# Altium PCB 4_channel_relay.PcbDoc
Units mm, origin at the board's own origin, x right, y up, seen from the top; angles counter-clockwise.
Board outline 102.27 x 70.58 mm, 2 copper layers (Top Layer, Bottom Layer); 40 components, 52 nets, 202 pads, 43 vias.
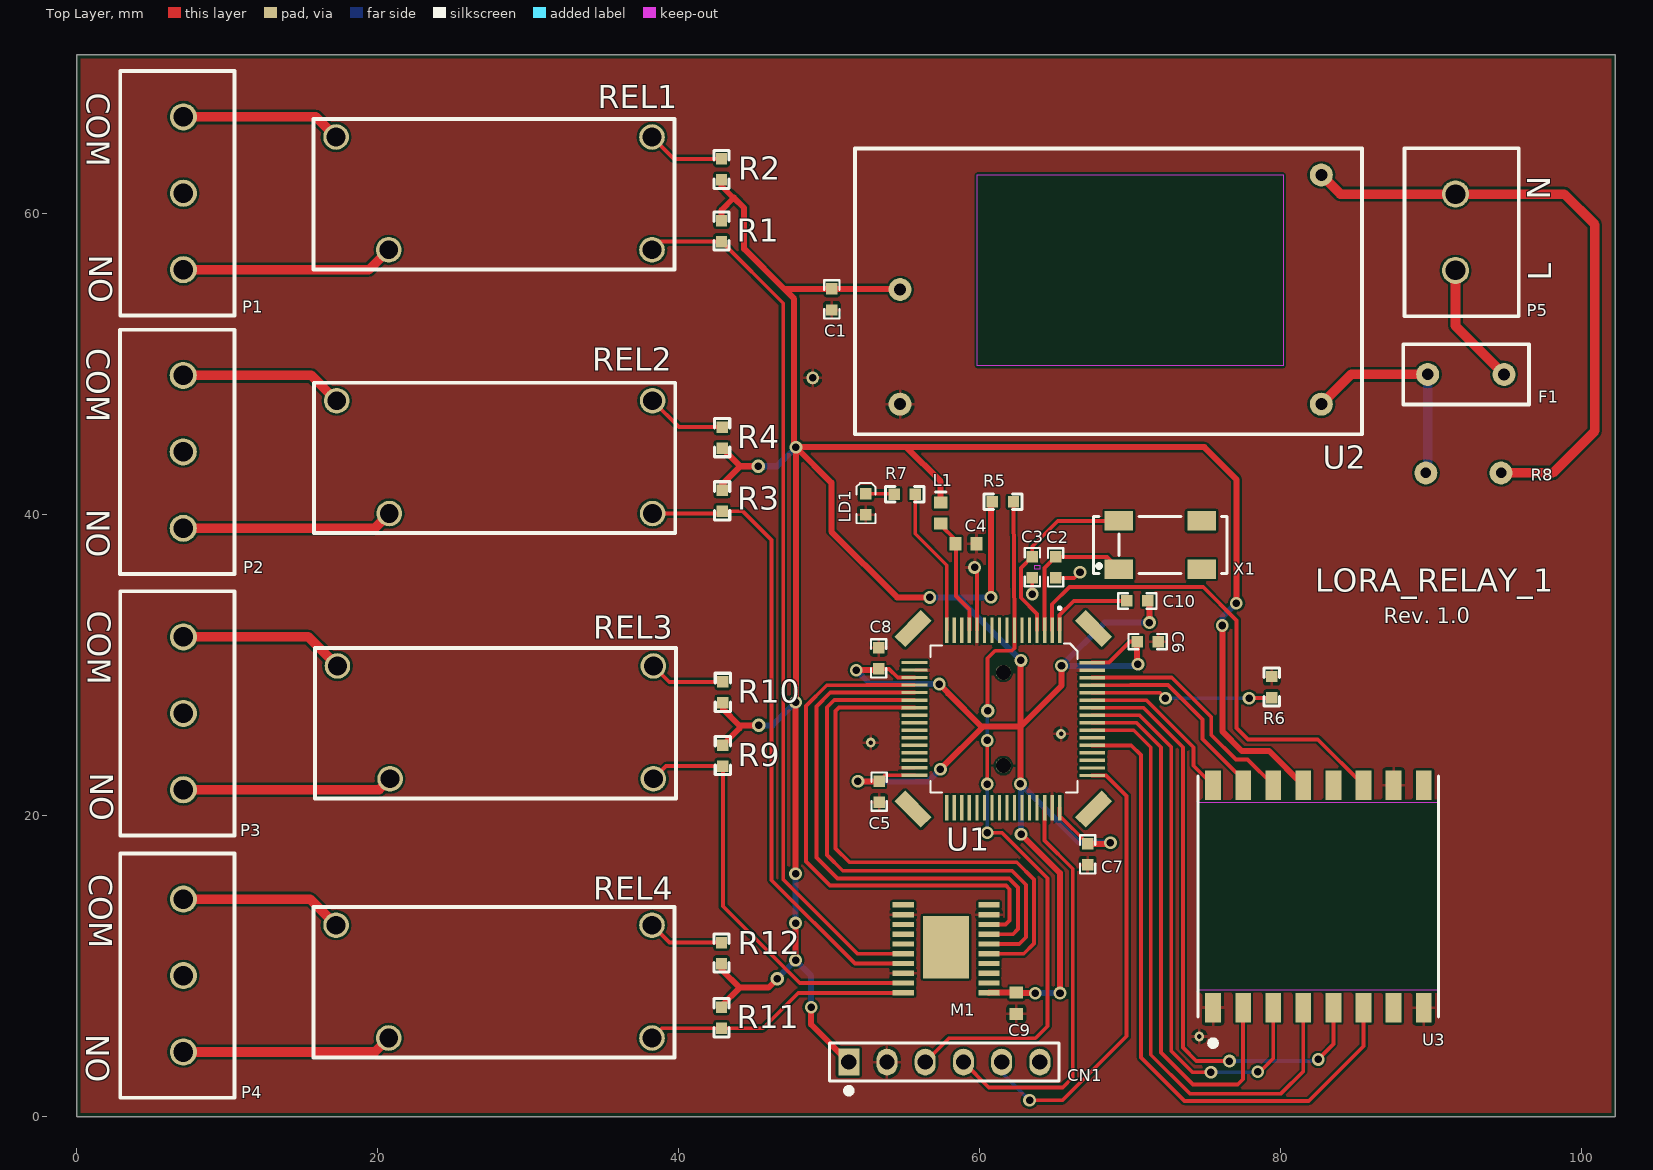
[diagram p0: Top Layer view]
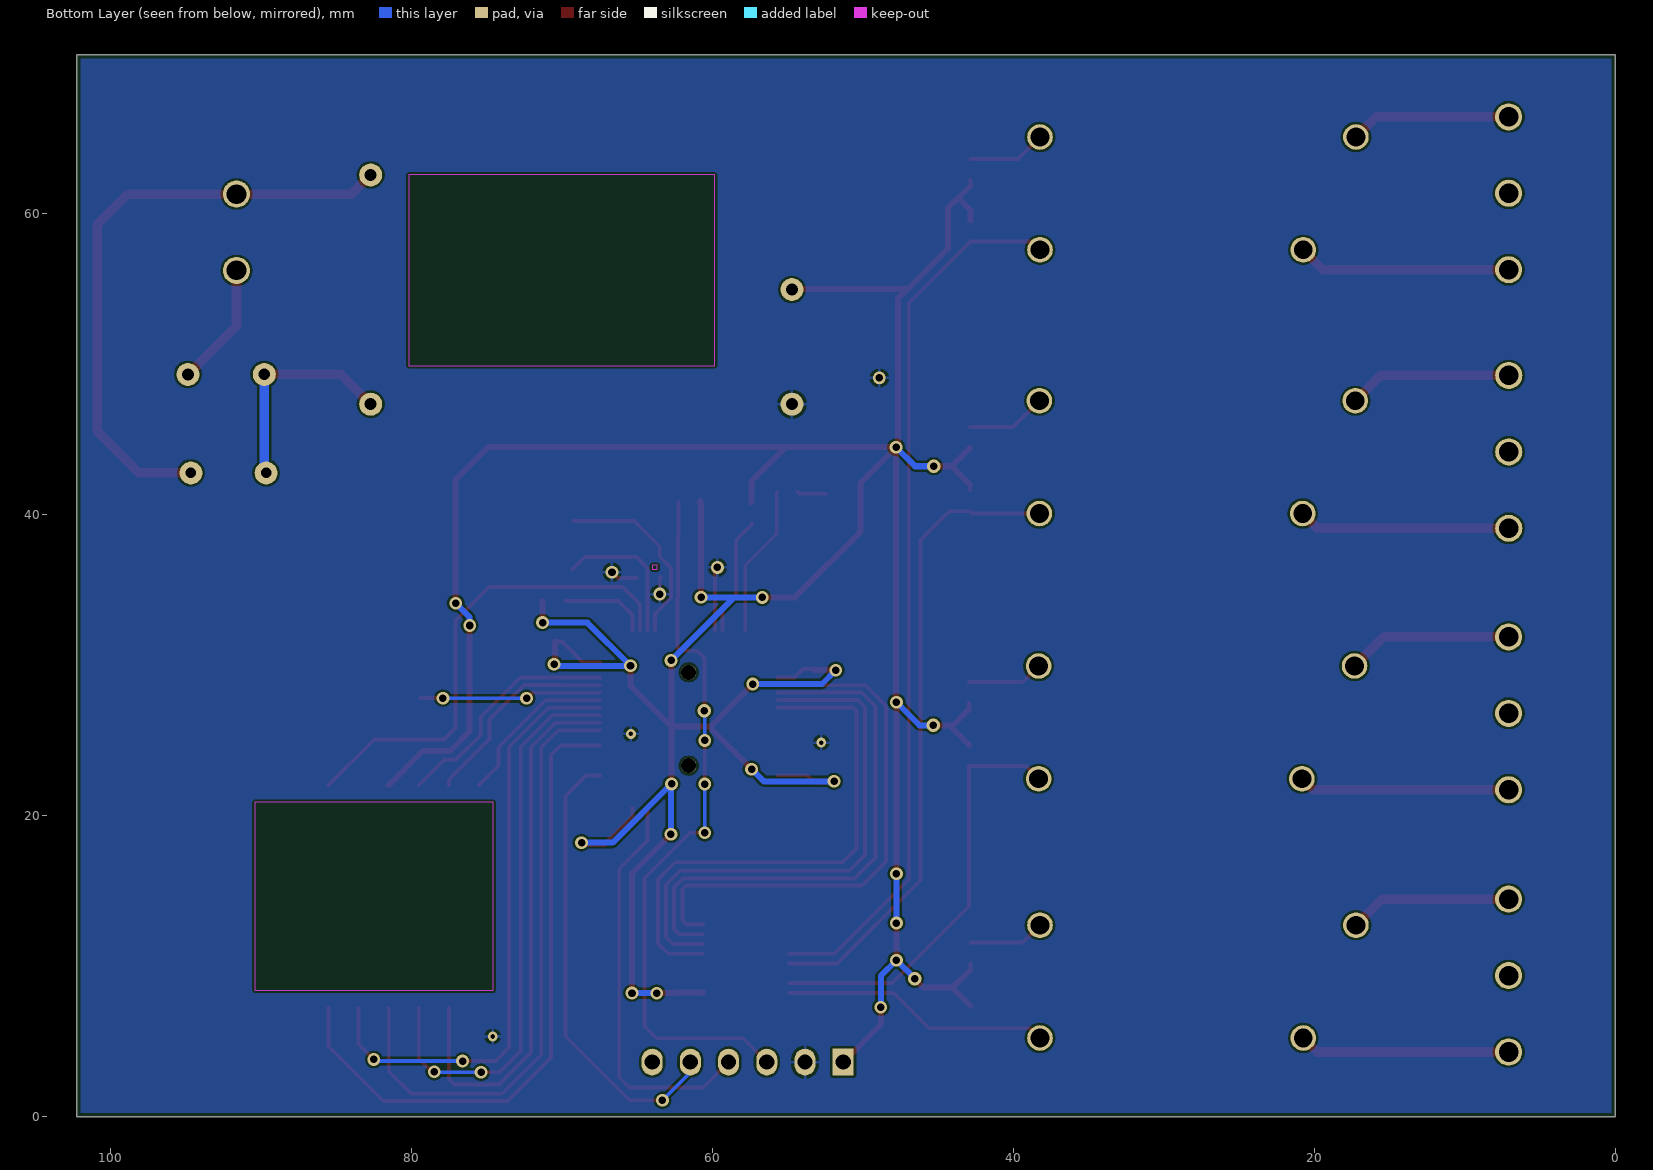
[diagram p1: Bottom Layer view, seen from below]

## Layer stack, top to bottom
Top Solder: solder mask 0.0102, Solder Resist, Dk 3.5
Top Layer: signal copper 0.0356
Dielectric 1: dielectric 0.32, FR-4, Dk 4.8
Bottom Layer: signal copper 0.0356
Bottom Solder: solder mask 0.0102, Solder Resist, Dk 3.5

## Board outline
0,-0.01 102.27,-0.01 102.27,70.57 0,70.57

## Design rules (kind name [scope] priority, off if disabled: settings)
BoardOutlineClearance [All] p1: gap=0.25 ignorepadtopadclearanceinfootprint=FALSE except(0: Arc-SplitContinuation Track-SplitContinuation SMDPad-SplitContinuation THPad-SplitContinuation Via-SplitContinuation Fill-SplitContinuation Poly-SplitContinuation Region-SplitContinuation Text-SplitContinuation)
Clearance [InNetClass('240VAC')] p1: gap=0.15 ignorepadtopadclearanceinfootprint=FALSE except(0: Arc-Hole Track-Hole SMDPad-Hole THPad-Hole Via-Hole Fill-Hole Poly-Hole Region-Hole Text-Hole; 3: Arc-Arc Arc-Track Track-Track)
Clearance Clearance-xPP-xTP-xTT [All] p2: gap=0.15 ignorepadtopadclearanceinfootprint=FALSE except(0: Arc-Hole Track-Hole SMDPad-Hole THPad-Hole Via-Hole Fill-Hole Poly-Hole Region-Hole Text-Hole)
ComponentClearance [All] p1: gap=0.25 collisioncheckmode=3 verticalgap=0.25 showdistances=FALSE
DiffPairsRouting [All] p1: maxlimit=0.25 minlimit=0.25 mostfreqgap=0.25 toplayer_minwidth=0.381 toplayer_maxwidth=0.381 toplayer_prefwidth=0.381 bottomlayer_minwidth=0.381 bottomlayer_maxwidth=0.381 bottomlayer_prefwidth=0.381 maxuncoupledlength=12.5
Height [All] p1: minheight=0 maxheight=25 prefheight=12.5
HoleSize HoleSize-PTH [All] p1: absolutevalues=TRUE maxlimit=2 minlimit=0.3 maxpercent=80.000 minpercent=20.000
HoleToHoleClearance [All] p1: gap=0.35 allowstackedmicrovias=TRUE
MinimumAnnularRing "Minimum IAR  >0.45mm" [((ObjectKind = 'Pad') OR (ObjectKind = 'Via')) And (Layer = 'MultiLayer') And (HoleDiameter > AsMM(0.45))] p1: minimumring=0.125 // minimum inner annular ring for pads > 0.45mm finished hole size
MinimumAnnularRing "Minimum IAR <=0.45mm" [((ObjectKind = 'Pad') OR (ObjectKind = 'Via')) And (Layer = 'MultiLayer') And (HoleDiameter <= AsMM(0.45))] p2: minimumring=0.175 // minimum inner annular ring for pads <= 0.45mm finished hole size
MinimumSolderMaskSliver [All] p1: minsoldermaskwidth=0.08
PlaneClearance PlaneClearance-IPI [All] p1: clearance=0.25
PlaneConnect [All] p1: planeconnectstyle=Relief reliefexpansion=0.175 reliefentries=4 reliefconductorwidth=0.2 reliefairgap=0.2
PolygonConnect PolygonConnect-xTW [All] p1: connectstyle=Relief reliefconductorwidth=0.2 reliefentries=4 polygonreliefangle="90 Angle" airgapwidth=0.2
RoutingCorners [All] p1: cornerstyle=45-Degree minsetback=2.5 maxsetback=2.5
RoutingVias "RoutingVias > 0.45mm" [(ObjectKind = 'Via') And (HoleDiameter > AsMM(0.45))] p1: holewidth=0.5 width=0.85 viastyle="Through Hole" minholewidth=0.5 minwidth=0.85 maxholewidth=0.9 maxwidth=1.25 // finishet hole size > 0.45mm
RoutingVias "RoutingVias <= 0.45mm" [(ObjectKind = 'Via') And (HoleDiameter <= AsMM(0.45))] p2: holewidth=0.3 width=0.65 viastyle="Through Hole" minholewidth=0.25 minwidth=0.6 maxholewidth=0.45 maxwidth=0.8 // finishet hole size <= 0.45mm
SilkToSilkClearance [All] p1: silktosilkclearance=0.2
SilkToSolderMaskClearance SilkscreenOverComponentPads [IsPad] p1: minsilkscreentomaskgap=0.01 clearancetoexposedcopper=TRUE
SolderMaskExpansion [All] p1: expansion=0
UnRoutedNet [All] p1: checkbadconnections=TRUE
Width Width-xTW [All] p1: maxlimit=1.5 minlimit=0.15 preferedwidth=0.2
18 further rules are at their usual default settings.

## Components (designator, comment, footprint, x,y, rotation, side; value= is the part's Value field where it differs from the comment)
C1 "100nF" 0603C 50.2,54.3 r90 top value=0.1µF
C2 "10pF[N/A]" 0603C 65.07,36.49 r90 top value=10pF
C3 "10pF[N/A]" 0603C 63.52,36.51 r90 top
C4 "Cap Semi" 1608[0603] 59.1,38.07 r0 top
C5 "100nF" 0603C 53.335,21.591 r90 top
C6 "100nF" 0603C 71.19,31.56 r180 top
C7 "100nF" 0603C 67.2,17.42 r90 top
C8 "100nF" 0603C 53.3,30.445 r270 top
C9 "Cap Semi" 1608[0603] 62.45,7.52 r270 top
C10 "100nF" 0603C 70.5,34.26 r0 top value=0.1µF
CN1 "Header 6X1" 1*6P 51.32,3.61 r0 top
F1 "fuse" fuse 94.88,49.32 r180 top value="1A 250VAC"
L1 "Bead" INDC1608L 57.424,40.099 r270 top value="600 OHM"
LD1 "Green" 0603D 52.457,40.695 r90 top value=571nm
M1 "MAX4821" MAX4821 60.64,8.21 r180 top
P1 "relay_header_3" ac_header_3 2.89,53.24 r90 top
P2 "relay_header_3" ac_header_3 2.88,36.05 r90 top
P3 "relay_header_3" ac_header_3 2.89,18.67 r90 top
P4 "relay_header_3" ac_header_3 2.89,1.24 r90 top
P5 "AC_HEADER" ac_header_2 95.85,64.35 r270 top
R1 "50" 0603R 42.86,58.845 r90 top value="50 Ohms"
R2 "50" 0603R 42.86,62.945 r270 top
R3 "50" 0603R 42.9,40.916 r90 top
R4 "50" 0603R 42.9,45.115 r270 top
R5 "4K7" 0603R 61.57,40.85 r0 top value="4.7 kOhms"
R6 "4K7" 0603R 79.44,28.54 r90 top
R7 "510" 0603R 55.04,41.351 r0 top value="510 Ohms"
R8 "" varistor 94.68,42.77 r180 top value="360V 400A"
R9 "50" 0603R 42.95,23.985 r90 top
R10 "50" 0603R 42.95,28.185 r270 top
R11 "50" 0603R 42.86,6.555 r90 top
R12 "50" 0603R 42.86,10.855 r270 top
REL1 "ADW1103W" ADW1103W 39.74,37.7 r180 top
REL2 "ADW1103W" ADW1103W 39.78,20.17 r180 top
REL3 "ADW1103W" ADW1103W 39.83,2.54 r180 top
REL4 "ADW1103W" ADW1103W 39.74,-14.69 r180 top
U1 "MCU_LQFP64" LQFP64 61.59,26.417 r180 top
U2 "RAC01-3.3SC" RAC01-3.3SC 82.73,47.34 r180 top
U3 "RFM95W-868S2" XCVR_RFM95W-868S2 82.534,14.618 r90 top
X1 "32.768K[N/A]" XTAL_4SM_8X3R8 72.02,37.98 r0 top

## Footprints (in the part's own frame and the unit in brackets; to place one, negate y for a bottom-side part, rotate by r counter-clockwise, add the part's x,y. Pads: shape width x height; smd on the part's side, far side on the other; paste and mask are expansions set on the pad)
1*6P [mil]
  rect 55x70 hole 40: 1(0,0)
  oval 55x70 hole 40: 2(400,0) 3(100,0) 4(300,0) 5(200,0) 6(500,0)
  silkscreen extent -50,-82 550,50
0603C [mil]
  rect 30x30 smd: 1(27.5,0) 2(-27.5,0)
  silkscreen extent -50,-20 50,20
0603D [mil]
  rect 30x30 smd: 1(27.5,0) 2(-27.5,0)
  silkscreen extent -50,-25 55,25
0603R [mil]
  rect 30x30 smd: 1(27.5,0) 2(-27.5,0)
  silkscreen extent -50,-20 50,20
1608[0603] [mm] "Chip Capacitor, Body 1.6x0.8mm, IPC High Density"
  rect 0.8x0.9 smd: 1(-0.7,0) 2(0.7,0)
  body extent -0.87,-0.48 0.87,0.48, height 1.3
ac_header_2 [mm] "230VAC 2 pin header"
  round 1.8 hole 1.3: 1(3.04,-4.2) 2(8.12,-4.2)
  silkscreen extent 0,-7.6 11.16,0
ac_header_3 [mm] "230VAC header 3 pin"
  round 1.8 hole 1.3: 1(13.2,-4.2) 2(3.04,-4.2) 3(8.12,-4.2)
  silkscreen extent 0,-7.6 16.24,0
ADW1103W [mm]
  round 1.7 hole 1.25: 1(1.5,-19.9) 2(1.5,-27.4) 3(22.5,-27.4) 4(19,-19.9)
  silkscreen extent 0,-28.6 24,-18.6
fuse [mil] "240VAC 1A"
  round 60 hole 31.5: 1(0,0)
  round 60 hole 30: 2(200,0)
  silkscreen extent -65,-79 264,79
INDC1608L [mm] "Chip Inductor, Body 1.6x0.8mm, IPC High Density"
  rect 0.8x0.9 smd: 1(-0.7,0) 2(0.7,0)
  silkscreen extent -1.4,-0.35 -1.4,0.35, body extent -0.87,-0.48 0.87,0.48, height 0.55
LQFP64 [mm]
  rect 1x2.5 smd rot 135: 0(-6,6) 0(6,-6)
  rect 1x2.5 smd rot 45: 0(-6,-6) 0(6,6)
  round 1 hole 1 unplated: 0(0,3.1) 0(0,-3.1)
  rect 0.22x1.7 smd: 1(-3.747,-5.901) 2(-3.247,-5.901) 3(-2.747,-5.901) 4(-2.247,-5.901) 5(-1.747,-5.901) 6(-1.247,-5.901) 7(-0.747,-5.901) 8(-0.247,-5.901) 9(0.253,-5.901) 10(0.753,-5.901) 11(1.253,-5.901) 12(1.753,-5.901) 13(2.253,-5.901) 14(2.753,-5.901) 15(3.253,-5.901) 16(3.753,-5.901) 33(3.753,5.902) 34(3.253,5.902) 35(2.753,5.902) 36(2.253,5.902) 37(1.753,5.902) 38(1.253,5.902) 39(0.753,5.902) 40(0.253,5.902) 41(-0.247,5.902) 42(-0.747,5.902) 43(-1.247,5.902) 44(-1.747,5.902) 45(-2.247,5.902) 46(-2.747,5.902) 47(-3.247,5.902) 48(-3.747,5.901)
  rect 1.7x0.22 smd: 17(5.901,-3.753) 18(5.901,-3.253) 19(5.901,-2.753) 20(5.901,-2.253) 21(5.901,-1.753) 22(5.901,-1.253) 23(5.901,-0.753) 24(5.901,-0.253) 25(5.901,0.247) 26(5.901,0.747) 27(5.901,1.247) 28(5.901,1.747) 29(5.901,2.247) 30(5.901,2.747) 31(5.901,3.247) 32(5.901,3.747) 49(-5.902,3.753) 50(-5.902,3.253) 51(-5.902,2.753) 52(-5.902,2.253) 53(-5.902,1.753) 54(-5.902,1.253) 55(-5.902,0.753) 56(-5.902,0.253) 57(-5.902,-0.247) 58(-5.902,-0.747) 59(-5.902,-1.247) 60(-5.902,-1.747) 61(-5.902,-2.247) 62(-5.902,-2.746) 63(-5.902,-3.246) 64(-5.902,-3.746)
  silkscreen extent -4.94,-7.42 4.84,4.89
MAX4821 [mm]
  rect 1.4x0.35 smd: 1(0,0) 2(0,-0.65) 3(0,-1.3) 4(0,-1.95) 5(0,-2.6) 6(0,-3.25) 7(0,-3.9) 8(0,-4.55) 9(0,-5.2) 10(0,-5.85) 11(5.7,-5.85) 12(5.7,-5.2) 13(5.7,-4.55) 14(5.7,-3.9) 15(5.7,-3.25) 16(5.7,-2.6) 17(5.7,-1.95) 18(5.7,-1.3) 19(5.7,-0.65) 20(5.7,0)
  rect 3.05x4.13 smd: 30(2.86,-3.03)
RAC01-3.3SC [mil] "AC/DC converter"
  round 60 hole 31.5: 1(0,0) 2(0,-600) 3(1102.36,0) 4(1102.36,-300)
  Keep-Out Layer region: 100,-100 900,-100 900,-600 100,-600
  silkscreen extent -106,-669 1220,79
varistor [mil]
  round 60 hole 27.56: 1(0,0) 2(196.85,0)
XCVR_RFM95W-868S2 [mm]
  rect 1.95x1.05 smd: 1(-7.4,7) 2(-7.4,5) 3(-7.4,3) 4(-7.4,1) 5(-7.4,-1) 6(-7.4,-3) 7(-7.4,-5) 8(-7.4,-7) 9(7.4,-7) 10(7.4,-5) 11(7.4,-3) 12(7.4,-1) 13(7.4,1) 14(7.4,3) 15(7.4,5) 16(7.4,7)
  silkscreen extent -10.04,-8 8,8
XTAL_4SM_8X3R8 [mm]
  rect 1.9x1.3 smd: 1(-2.75,-1.6) 2(2.75,-1.6) 3(2.75,1.6) 4(-2.75,1.6)
  silkscreen extent -4.44,-1.91 4.44,1.91

## Part data
C1 C10: library part Cap, "Capacitor", Manufacturer="AVX Corporation", Price=0.29, ProductNumber=C1608X5R1H104K080AA, Published=8-Jun-2000, Publisher="Altium Limited", Revision="July-2002: Re-released for DXP Platform.", Stock=35, Vendor Name=Digikey, Vendor PN=478-6206-1-ND
C2: library part Cap, "Capacitor", Manufacturer="Murata Electronics North America", Price=0,08, ProductNumber=GRM1885C1H100JA01D, Stock=119.425, Vendor Name=Digikey, Vendor PN=490-1403-1-ND
C3: library part CAP, "Capacitor", Manufacturer="Murata Electronics North America", ProductNumber=GRM1885C1H100JA01D, Vendor Name=Digikey
C4 C9: "Capacitor (Semiconductor SIM Model)", Manufacturer=TDK, LatestRevisionDate=29-May-2009, LatestRevisionNote="IPC-7351 Footprint Added.", PackageDescription="Chip Capacitor", PackageReference=C1206, ProductNumber=C1608X5R1H104K080AA, Published=8-Jun-2000, Publisher="Altium Limited", Vendor Name=Digikey
C5 C6 C7 C8: library part Cap, "Capacitor", Manufacturer=TDK, ProductNumber=C1608X5R1H104K080AA, Published=8-Jun-2000, Publisher="Altium Limited", Revision="July-2002: Re-released for DXP Platform.", Vendor Name=Digikey
CN1: "Header, 6-Pin, Single row", Manufacturer=Molex, LatestRevisionDate=17-Jul-2002, LatestRevisionNote="Re-released for DXP Platform.", Price=0.41, ProductNumber=0022232061, Publisher="Altium Limited", Stock=26,758, Vendor Name=Digikey, Vendor PN=WM4204-ND
F1: "240VAC 1A", Manufacturer="Bel Fuse Inc.", Price=0.36, ProductNumber="RST 1-BULK", Stock=11,016, Vendor Name=Digikey, Vendor PN=507-1176-ND
L1: library part Inductor, "Inductor", Manufacturer="Taiyo Yuden", Code_IEC=1005, Code_JEITA=0402, LatestRevisionDate=29-May-2009, LatestRevisionNote="IPC-7351 Footprint Added.", PackageDescription="Chip Inductor", PackageReference=0402-A, Price=0.10, ProductNumber=BK1608HS601-T, Published=8-Jun-2000, Publisher="Altium Limited", Stock=40,993, Vendor Name=Digikey, Vendor PN=587-1874-1-ND
LD1: library part LED2, "Typical RED, GREEN, YELLOW, AMBER GaAs LED", Manufacturer=Lite-On, Price=0,27, ProductNumber=LTST-C190KGKT, Published=8-Jun-2000, Publisher="Altium Limited", Revision="July-2002: Re-released for DXP Platform.", Stock=1.780.452, Vendor Name=Digikey, Vendor PN=160-1435-1-ND
M1: Manufacturer="Maxim Integrated", Price=2,59, ProductNumber=MAX4821EUP+, Stock=2.209, Vendor Name=Digikey, Vendor PN=MAX4821EUP+-ND
P1 P2 P3 P4 P5: Manufacturer="On Shore Technology", Vendor Name=Digikey
  P1: Price=0,85, ProductNumber=OSTTC032162, Stock=17.309, Vendor PN=ED2610-ND
  P2 P3 P4: ProductNumber=OSTTC032162
  P5: Price=0,80, ProductNumber=OSTTC022162, Stock=48.711, Vendor PN=ED2609-ND
R1 R2 R3 R4 R9 R10 R11 R12: library part Res1, "Resistor", Manufacturer="Vishay Dale", ProductNumber=CRCW060350R0FKEA, Published=8-Jun-2000, Publisher="Altium Limited", Revision="July-2002: Re-released for DXP Platform."
  R1: Price=0.0169, Stock=12,926, Vendor Name=Farnell, Vendor PN=2112878
  R2 R3 R4 R9 R10 R11 R12: Vendor Name=Digikey
R5 R6: library part Res1, "Resistor", Manufacturer=Yageo, ProductNumber=RC0603JR-074K7L, Published=8-Jun-2000, Publisher="Altium Limited", Revision="July-2002: Re-released for DXP Platform.", Vendor Name=Digikey
  R5: Price=0,10, Stock=3.704.975, Vendor PN=311-4.7KGRCT-ND
R7: library part Res1, "Resistor", Manufacturer="Rohm Semiconductor", Price=0.10, ProductNumber=ESR03EZPJ511, Published=8-Jun-2000, Publisher="Altium Limited", Revision="July-2002: Re-released for DXP Platform.", Stock=24,289, Vendor Name=Digikey, Vendor PN=RHM510DCT-ND
R8: library part Res1, "Resistor", Manufacturer="Epcos (TDK)", Price=0.40, ProductNumber=B72205S0231K101, Published=8-Jun-2000, Publisher="Altium Limited", Revision="July-2002: Re-released for DXP Platform.", Stock=1,230, Vendor Name=Digikey, Vendor PN=495-6478-ND
REL1 REL2 REL3 REL4: Manufacturer=Panasonic, ProductNumber=ADW1103W
  REL1: Price=6,21, Stock=85, Vendor Name=Mouser, Vendor PN=769-ADW1103TW
  REL2 REL3 REL4: Vendor Name=Digikey
U1: Manufacturer=STM, Price=7,76, ProductNumber=STM32L476RGT6, Stock=4.505, Vendor Name=Mouser, Vendor PN=511-STM32L476RGT6
U2: "AC/DC converter", Manufacturer="Recom Power", Price=10,63, ProductNumber=RAC01-3.3SC, Stock=268, Vendor Name=Mouser, Vendor PN=919-RAC01-3.3SC
U3: Manufacturer="RF Solutions", Package="SMD-16 Hope Microelectronics", Availability=Warning, MF="Hope Microelectronics", MP=RFM95W-868S2, Price=15,16, ProductNumber=RFM95W-868S2, Stock=467, Vendor Name=Digikey, Vendor PN=RFM95W-868S2-ND
X1: library part MC306, Vendor Name=Digikey

## Free pads (board coordinates)
  round 0.85 hole 0.5: 24(48.92,49.09)

## Via types
v1: diameter 0.85, hole 0.5, Top Layer to Bottom Layer, 36 vias
v2: diameter 0.9, hole 0.5, Top Layer to Bottom Layer, 4 vias
v3: diameter 0.65, hole 0.3, Top Layer to Bottom Layer, 3 vias

## Nets (pads, with @x,y where several pads share a name; then routed paths per layer and width w, separated by ;. In a path a pad name is that pad's centre, name@x,y a point inside that pad or via, vN(x,y) a via of type N, cw(c..) or ccw(c..) an arc to the next point about the centre after c; other vN are vias at no path point)
GND: C1.2 C2.2 C3.2 C4.2 C5.2 C6.2 C7.2 C8.2 C9.2 CN1.3 LD1.2 M1.9 M1.12 M1.18 pad.24 R6.1 U1.12 U1.18 U1.31 U1.47 U1.63 U2.3 U3.1 U3.8 U3.10 | length 7.2
  Top Layer w0.254: v1(59.68,36.49) 59.837,36.333 U1.12 ; C3.2@63.42,35.812 C3.2 v1(63.52,34.72) ; C2.2 66.312,35.792 v1(66.69,36.17)
  other v3: 74.62,5.31 52.78,24.85 65.43,25.42
NetC2_1: C2.1 U1.3 X1.1 | length 9.8
  Top Layer w0.254: U1.3 64.337,36.455 C2.1 68.502,37.189 X1.1@69.34,36.35
NetC3_1: C3.1 U1.4 X1.4 | length 12.8
  Top Layer w0.254: U1.4 63.837,33.393 62.76,34.47 62.76,36.448 C3.1 63.52,37.89 65.21,39.58 X1.4
NetC4_1: C4.1 L1.2 U1.13 | length 7.9
  Top Layer w0.254: L1.2 57.421,39.396 57.421,39.319 58.44,38.3 58.44,34.59 59.337,33.693 U1.13
NetC10_2: C10.2 U1.1 | length 5.9
  Top Layer w0.254: U1.1 65.337,33.327 66.27,34.26 C10.2
NetF1_1: F1.1 P5.2 | length 8.2
  Top Layer w0.635: P5.2 91.65,52.55 F1.1
NetF1_2: F1.2 R8.2 U2.1 | length 14.5
  Top Layer w0.635: U2.1 84.71,49.32 F1.2
  Bottom Layer w0.635: R8.2 89.8,42.89 F1.2
NetLD1_1: LD1.1 R7.2 | length 2
  Top Layer w0.254: LD1.1 54.235,41.393 R7.2@54.362,41.52
NetM1_5: M1.5 U1.23 | length 36.1
  Top Layer w0.254: U1.23 50.66,27.17 50.436,26.946 50.436,17.814 51.36,16.89 62.49,16.89 63.63,15.75 63.63,11.49 62.95,10.81 M1.5
NetM1_6: M1.6 U1.22 | length 36
  Top Layer w0.254: U1.22 50.35,27.67 49.876,27.196 49.876,17.374 50.92,16.33 62.17,16.33 63.1,15.4 63.1,11.91 62.65,11.46 M1.6
NetM1_7: M1.7 U1.21 | length 36
  Top Layer w0.254: U1.21 50.09,28.17 49.166,27.246 49.166,17.204 50.56,15.81 61.97,15.81 62.576,15.204 62.576,12.446 62.24,12.11 M1.7
NetM1_8: M1.8 U1.20 | length 35.9
  Top Layer w0.254: U1.20 52.5,28.67 52.49,28.66 49.86,28.66 48.486,27.286 48.486,16.934 50.08,15.34 61.76,15.34 62,15.1 62,13.02 61.74,12.76 M1.8
NetP1_1: P1.1 REL1.3 | length 10.7
  Top Layer w0.635: P1.1 15.9,66.44 REL1.3
NetP1_2: P1.2 REL1.4 | length 14.2
  Top Layer w0.635: P1.2 19.42,56.28 REL1.4
NetP2_1: P2.1 REL2.3 | length 10.9
  Top Layer w0.635: P2.1 15.6,49.25 REL2.3
NetP2_2: P2.2 REL2.4 | length 14.1
  Top Layer w0.635: P2.2 19.8,39.09 REL2.4
NetP3_1: P3.1 REL3.3 | length 11
  Top Layer w0.635: P3.1 15.4,31.87 REL3.3
NetP3_2: P3.2 REL3.4 | length 14
  Top Layer w0.635: P3.2 20.1,21.71 REL3.4
NetP4_1: P4.1 REL4.3 | length 10.9
  Top Layer w0.635: P4.1 15.51,14.44 REL4.3
NetP4_2: P4.2 REL4.4 | length 14
  Top Layer w0.635: P4.2 19.81,4.28 REL4.4
NetP5_1: P5.1 R8.1 U2.2 | length 40.7
  Top Layer w0.635: U2.2 84,61.31 P5.1 98.88,61.31 100.91,59.28 100.91,45.56 98.12,42.77 R8.1
NetR2_2: R2.2 REL1.2 | length 5.2
  Top Layer w0.254: REL1.2 39.696,63.643 R2.2
NetR4_2: R4.2 REL2.2 | length 5.3
  Top Layer w0.254: REL2.2 40.036,45.813 R4.2
NetR6_2: R6.2 U1.60 | length 12.1
  Top Layer w0.254: U1.60 71.996,28.164 v1(72.37,27.79) ; v1(77.93,27.8) 77.94,27.81 R6.2@79.44,27.81
  Bottom Layer w0.254: v1(72.37,27.79) 77.92,27.79 v1(77.93,27.8)
NetR10_2: R10.2 REL3.2 | length 5.1
  Top Layer w0.254: REL3.2 39.386,28.884 R10.2
NetR12_2: R12.2 REL4.2 | length 5.1
  Top Layer w0.254: REL4.2 39.396,11.553 R12.2
NRST: CN1.5 R5.1 U1.7 | length 47.8
  Top Layer w0.254: CN1.5 57.98,5.19 63.72,5.19 64.52,5.99 64.52,15.83 61.5,18.85 v1(60.52,18.85) ; v1(60.52,22.09) v1(60.52,24.99) v1@60.52,25.2 ; v2(60.55,26.97) 60.55,30.451 61.05,30.951 62.15,30.951 62.337,31.138 U1.7 R5.1
  Bottom Layer w0.254: v1(60.52,18.85) v1(60.52,22.09) ; v1(60.52,24.99) 60.52,26.94 v2(60.55,26.97)
OUT1: M1.20 R11.2 REL4.1 | length 17.9
  Top Layer w0.254: REL4.1 38.886,5.856 R11.2 45.606,5.856 47.96,8.21 M1.20
OUT2: M1.19 R9.2 REL3.1 | length 28.4
  Top Layer w0.254: REL3.1 39.176,23.286 R9.2 42.95,13.97 48.06,8.86 M1.19
OUT3: M1.17 R3.2 REL2.1 | length 43
  Top Layer w0.254: REL2.1@38.658,40.448 REL2.1 42.752,40.07 R3.2 44.282,40.218 46.19,38.31 46.19,15.7 51.73,10.16 M1.17
OUT4: M1.16 R1.2 REL1.1 | length 59
  Top Layer w0.254: REL1.1 38.787,58.147 R1.2 46.96,54.046 46.96,15.75 51.9,10.81 M1.16
PA2: R7.1 U1.16 | length 10.1
  Top Layer w0.254: R7.1@55.738,41.51 R7.1 55.738,38.732 57.837,36.633 U1.16
PA3: U1.17
PA8: U1.41
PA9: U1.42
PA10: U1.43
PB3: U1.55 U3.4 | length 40.9
  Top Layer w0.254: U1.55 70.266,25.664 71.39,24.54 71.39,4.1 73.98,1.51 80.06,1.51 81.534,2.984 U3.4
PB4: U1.56 U3.2 | length 36.8
  Top Layer w0.254: U1.56 70.456,26.164 72.08,24.54 72.08,4.24 74.21,2.11 77.18,2.11 77.534,2.464 U3.2
PB5: U1.57 U3.3 | length 37.5
  Top Layer w0.254: U1.57 70.636,26.664 72.76,24.54 72.76,4.33 74.16,2.93 v1(75.39,2.93) ; v1(78.5,2.97) 78.65,2.97 79.534,3.854 U3.3
  Bottom Layer w0.254: v1(75.39,2.93) 78.46,2.93 v1(78.5,2.97)
PB6: U1.58 U3.5 | length 40.5
  Top Layer w0.254: U1.58 70.906,27.164 73.53,24.54 73.53,4.57 74.42,3.68 v1(76.62,3.68) ; v1(82.52,3.79) 83.534,4.804 U3.5
  Bottom Layer w0.254: v1@76.62,3.69 v1@82.52,3.69 ; v1(82.52,3.79) v1@82.52,4.01
PB7: U1.59 U3.16 | length 11.1
  Top Layer w0.254: U1.59 71.116,27.664 74.24,24.54 74.24,23.312 U3.16
PB8: U1.61 U3.15 | length 13.8
  Top Layer w0.254: U1.61 70.03,28.685 72.545,28.685 74.84,26.39 74.84,25.08 77.534,22.386 U3.15
PB9: U1.62 U3.14 | length 15.7
  Top Layer w0.254: U1.62 72.786,29.164 75.41,26.54 75.41,25.36 77.05,23.72 77.832,23.72 U3.14
PB11: U1.30
PC6: U1.37
PC9: U1.40
PC12: U1.53 U3.6 | length 43.7
  Top Layer w0.254: U1.53 70.096,24.664 70.74,24.02 70.74,3.92 73.64,1.02 81.89,1.02 85.534,4.664 U3.6
PC13: U1.2 U3.11 | length 32.5
  Top Layer w0.254: U1.2 64.837,34.038 65.989,35.19 74.88,35.19 77.1,32.97 77.1,25.81 77.85,25.06 82.492,25.06 U3.11
SWO: CN1.6
TCK: CN1.2 U1.49 | length 30.4
  Top Layer w0.254: v1(63.34,1.07) 65.53,1.07 69.79,5.33 69.79,21.29 68.416,22.664 U1.49
  Bottom Layer w0.254: CN1.2 61.48,2.93 v1(63.34,1.07)
TMS: CN1.4 U1.46 | length 26.9
  Top Layer w0.254: CN1.4 60.62,1.93 65.54,1.93 66.21,2.6 66.21,16.46 64.337,18.333 U1.46
VDD: C1.1 C5.1 C6.1 C7.1 C8.1 C9.1 C10.1 CN1.1 L1.1 M1.1 R1.1 R2.1 R3.1 R4.1 R5.2 R9.1 R10.1 R11.1 R12.1 U1.19 U1.32 U1.48 U1.64 U2.4 U3.13 | length 281.3
  Top Layer w0.254: R11.1 R11.1@42.86,7.355 ; 42.86,9.755 R12.1 ; 42.86,61.845 R2.1 ; R3.1 42.9,42.013 ; 42.95,27.085 R10.1 ; 44.05,25.783 44.05,25.985 ; C8.1 53.999,29.747 54.575,29.17 U1.19 ; C5.1 53.716,22.671 U1.32 ; R5.2@60.812,40.79 R5.2@60.812,41.02 ; U1.48 65.337,19.982 C7.1 ; U1.64 68.624,30.164 70.02,31.56 C6.1
  Top Layer w0.4: R11.1@42.86,7.355 44.06,8.555 ; 42.86,9.755 44.06,8.555 ; R1.1 42.86,60.245 43.66,61.045 ; 42.86,61.845 43.66,61.045 ; 42.9,42.013 44.101,43.215 ; R4.1 44.101,43.215 ; R9.1 44.05,25.783 ; 42.95,27.085 44.05,25.985 v2(45.35,25.985) ; v2(45.3,43.215) 44.101,43.215 ; v2(46.57,9.14) 45.985,8.555 44.06,8.555 ; v1(47.78,10.38) v1(47.78,12.85) ; v1(47.78,16.13) v1(47.78,27.53) 47.81,27.56 v1(47.81,44.48) ; v1(48.82,7.26) 48.82,6.11 CN1.1 ; v1(51.81,29.66) 53.214,29.66 C8.1 ; v1(51.93,22.27) 53.316,22.27 C5.1 ; U2.4 54.692,54.999 C1.1 47.031,54.999 ; v1(56.7,34.5) 54.53,34.5 50.16,38.87 50.16,42.13 v1(47.81,44.48) ; v1(57.33,28.74) 57.925,28.145 57.925,28.125 60.141,25.909 60.239,25.909 ; v1(57.41,23.08) 60.239,25.909 ; L1.1 57.424,42.206 55.15,44.48 ; M1.1 60.65,8.22 C9.1 62.48,8.19 v1(63.72,8.19) ; v1(60.77,34.51) 60.77,40.749 60.812,40.79 R5.2 ; v1(62.733,22.103) 62.733,25.909 ; v1(62.76,30.31) 62.733,30.283 62.733,25.909 ; v1(62.77,18.76) 65.36,16.17 v1(65.36,8.2) ; v1(65.46,29.95) 65.46,28.636 62.733,25.909 ; C7.1 68.639,18.119 v1(68.71,18.19) ; C6.1 70.491,30.109 v1(70.54,30.06) ; v1(71.302,32.82) C10.1@71.302,34.26 ; v1(76.15,32.63) 76.15,25.59 77.45,24.29 79.262,24.29 U3.13 ; v1(77.08,34.11) 77.08,42.35 74.95,44.48 55.15,44.48 ; 43.66,61.045 43.677,61.062 44.36,60.38 44.36,57.67 47.031,54.999 ; 47.031,54.999 47.69,54.34 47.69,44.6 v1(47.81,44.48) ; v1(47.81,44.48) 55.15,44.48 ; 60.239,25.909 62.733,25.909
  Bottom Layer w0.4: v2(45.3,43.215) 46.545,43.215 v1(47.81,44.48) ; v2(45.35,25.985) 46.235,25.985 v1(47.78,27.53) ; v2(46.57,9.14) 46.57,9.17 v1(47.78,10.38) 48.82,9.34 v1(48.82,7.26) ; v1(47.78,12.85) v1(47.78,16.13) ; v1(51.81,29.66) 52.73,28.74 v1(57.33,28.74) ; v1(51.93,22.27) 56.6,22.27 v1(57.41,23.08) ; v1(56.7,34.5) 58.57,34.5 ; v1(60.77,34.51) 60.76,34.5 58.57,34.5 ; v1(62.733,22.103) v1@62.77,22.066 ; v1(62.76,30.31) 58.57,34.5 ; v1(62.77,18.76) v1@62.77,22.066 ; v1(63.72,8.19) 65.35,8.19 v1(65.36,8.2) ; v1(68.71,18.19) 66.646,18.19 v1@62.77,22.066 ; v1(70.54,30.06) 70.54,29.84 70.43,29.95 v1(65.46,29.95) 68.33,32.82 v1(71.302,32.82) ; v1(76.15,32.63) 76.15,33.18 v1(77.08,34.11)
pads on no net: M1.2 M1.3 M1.4 M1.10 M1.11 M1.13 M1.14 M1.15 M1.30 P1.3 P2.3 P3.3 P4.3 U1.0 U1.5 U1.6 U1.8 U1.9 U1.10 U1.11 U1.14 U1.15 U1.24 U1.25 U1.26 U1.27 U1.28 U1.29 U1.33 U1.34 U1.35 U1.36 U1.38 U1.39 U1.44 U1.45 U1.50 U1.51 U1.52 U1.54 U3.7 U3.9 U3.12 X1.2 X1.3

## Polygon pours and split planes (outlines as drawn)
GND on Bottom Layer "Top Layer-No Net" (solid, pour order 6): 0.06,70.47 101.97,70.47 102.12,70.62 102.34,70.4 102.34,0.05 0.07,0.05 -0.01,-0.03
GND on Top Layer "Top Layer-No Net" (solid, pour order 4): 0,70.54 0.03,70.57 102.26,70.57 102.26,-0.01 0.01,-0.01
no net on Keep-Out Layer "Top Layer-No Net 1" (solid): 63.675,36.63 63.675,36.38 64.005,36.38 64.005,36.63

## Keep-outs
Keep-Out Layer:
  region: 74.58,20.875 90.43,20.875 90.43,8.375 74.58,8.375

## Silkscreen, mask and mechanical layers (free items; w line width, h text height)
Top Overlay:
  text "COM" at 0.68,68.03 h1.52 r270
  text "N" at 97.96,60.94 h1.52 r90
  text "NO" at 0.84,57.26 h1.52 r270
  text "L" at 98.01,55.55 h1.52 r90
  text "COM" at 0.68,51.06 h1.52 r270
  text "NO" at 0.68,40.37 h1.52 r270
  text "LORA_RELAY_1" at 82.34,34.86 h1.52
  text "COM" at 0.73,33.62 h1.52 r270
  text "Rev. 1.0" at 86.89,32.78 h1.02
  text "NO" at 0.89,22.83 h1.52 r270
  text "COM" at 0.84,16.09 h1.52 r270
  text "NO" at 0.63,5.46 h1.52 r270
Mechanical 9:
  lines w0.254: -0.01,-0.01 102.22,-0.01 102.24,0.01 102.24,70.55 102.23,70.56 0.04,70.56 -0.01,70.61 -0.01,-0.01